# Altium PCB DelSolClock_Rear.PcbDoc
Units mil, origin at the board's own origin, x right, y up, seen from the top; angles counter-clockwise.
Board outline 2180.71 x 2455.51 mil, 2 copper layers (Top Layer, Bottom Layer); 14 components, 11 nets, 33 pads, 23 vias.
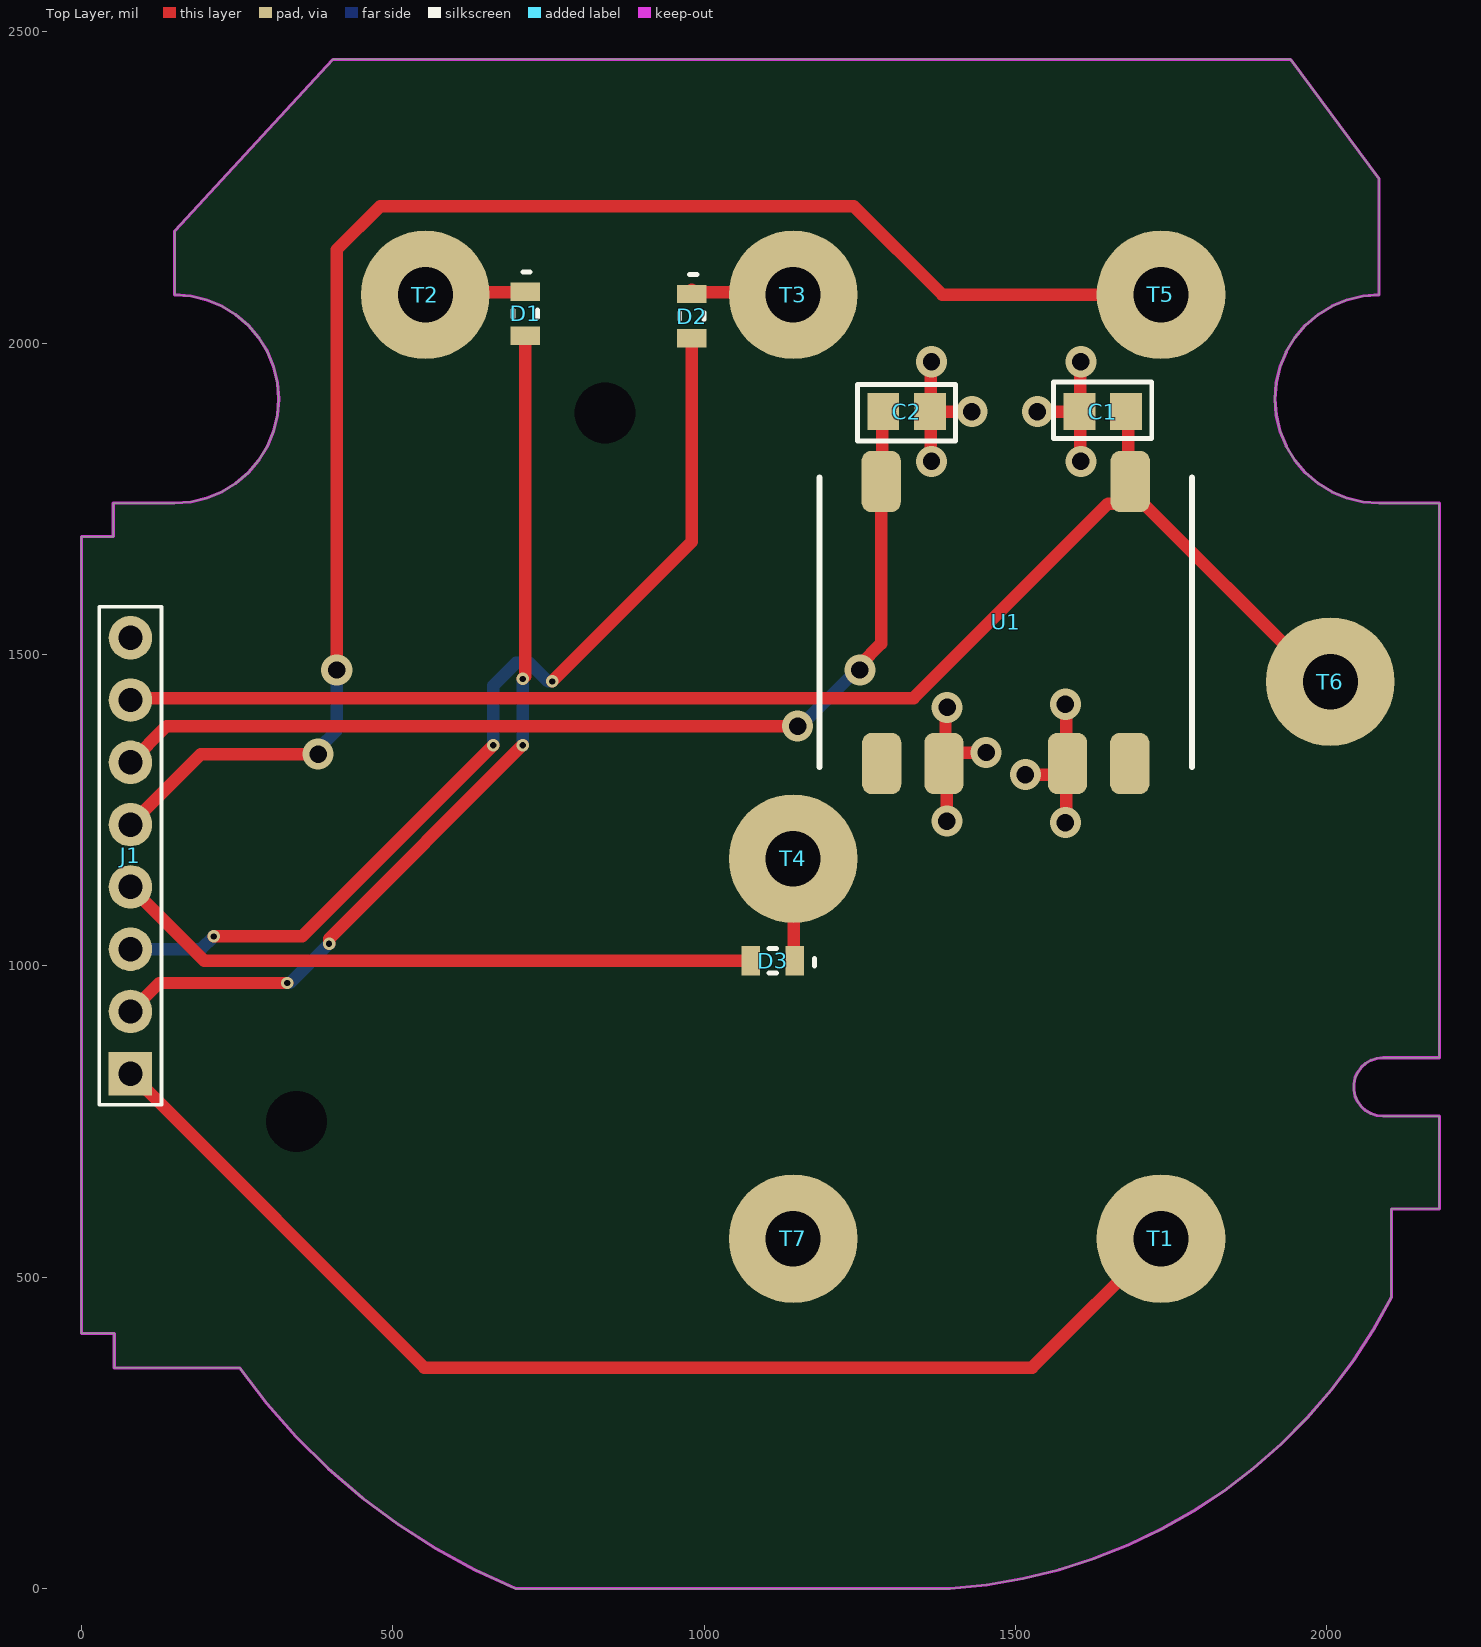
[diagram p0: Top Layer view]
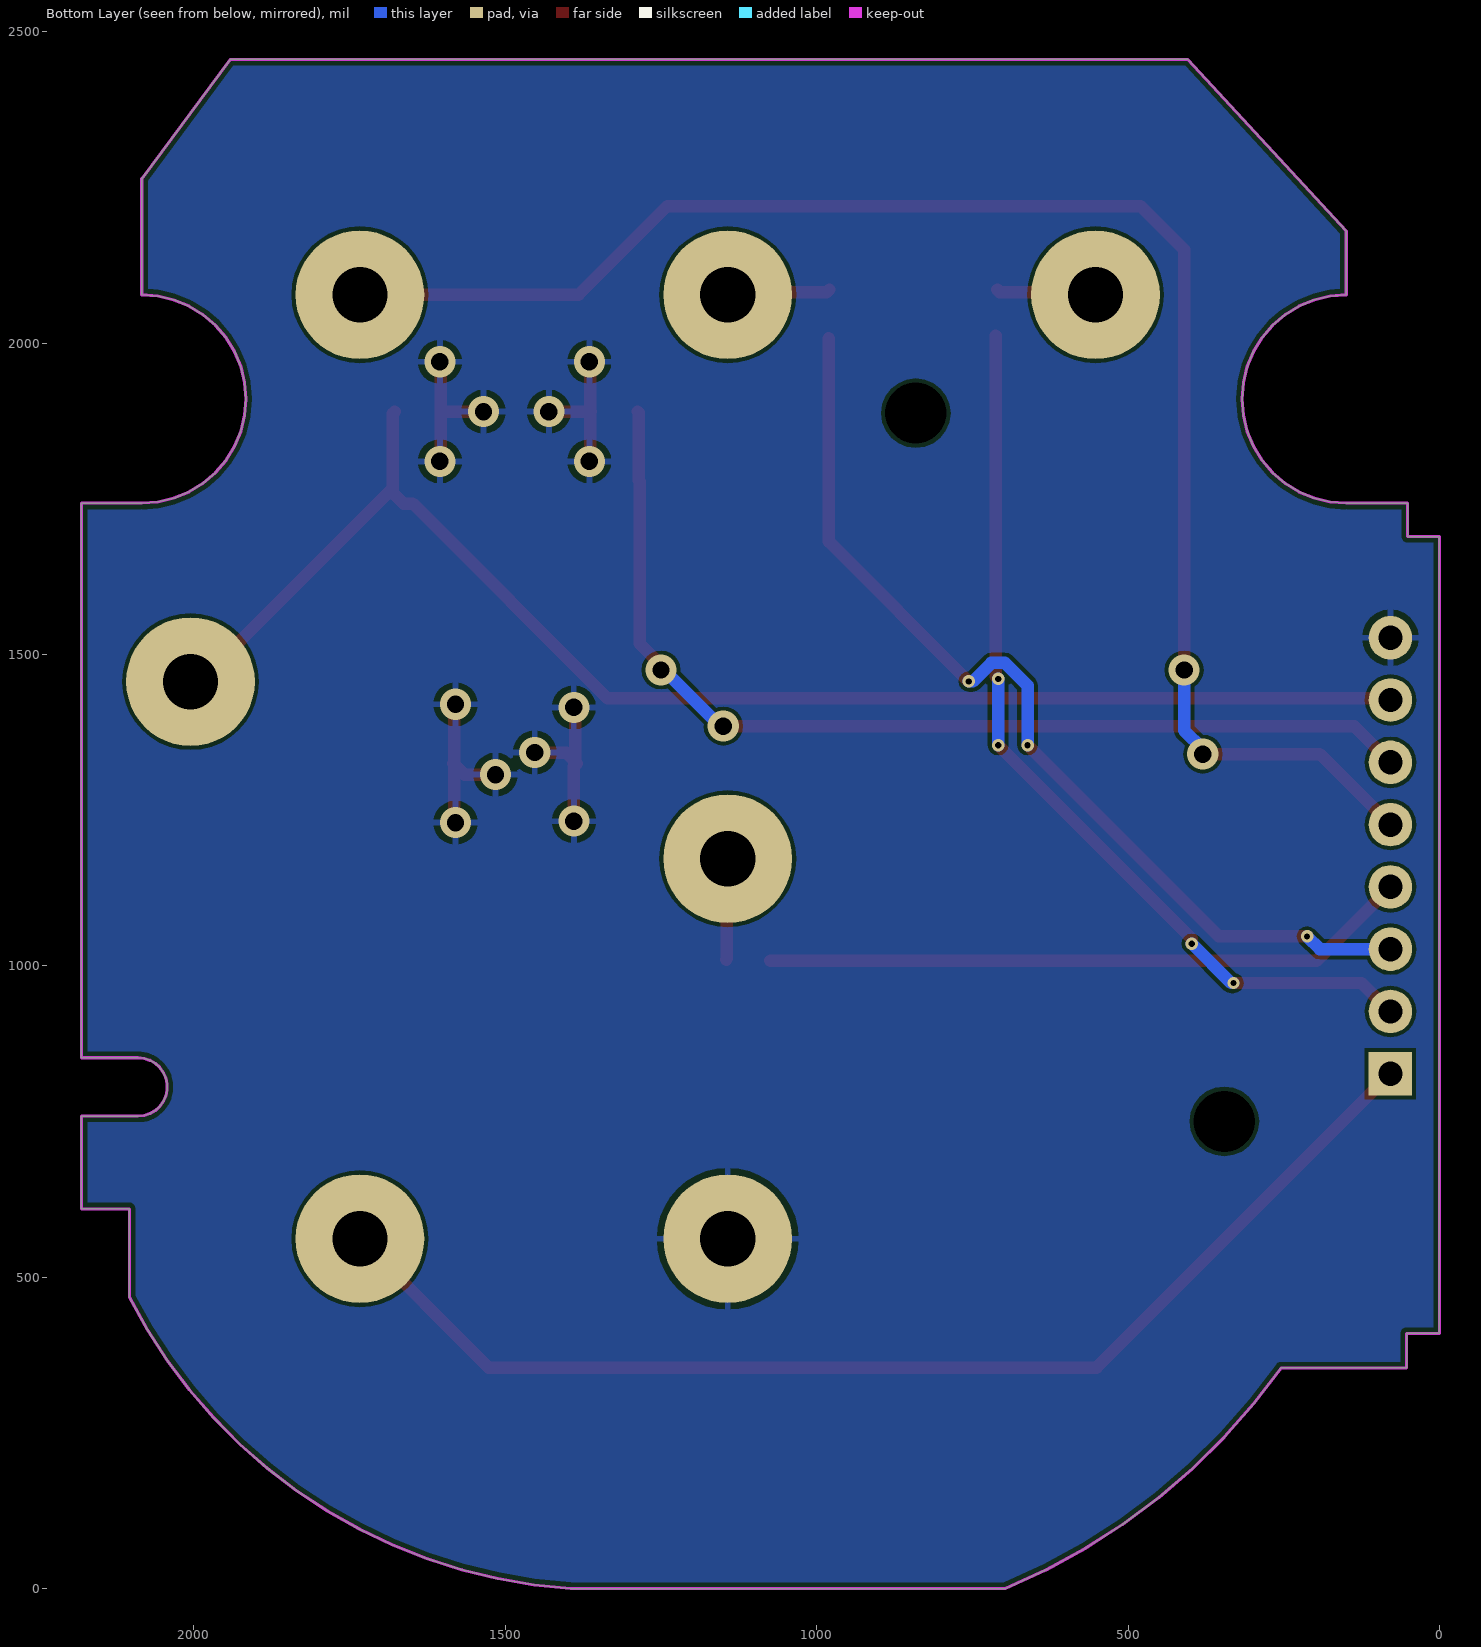
[diagram p1: Bottom Layer view, seen from below]

## Layer stack, top to bottom
Top Solder: solder mask 0.4, Solder Resist, Dk 3.5
Top Layer: signal copper 1.4
Dielectric 1: dielectric 12.6, FR-4, Dk 4.8
Bottom Layer: signal copper 1.4
Bottom Solder: solder mask 0.4, Solder Resist, Dk 3.5

## Board outline
0,1689.37 0,409.84 52.76,409.84 52.76,354.33 254.33,354.33 297.89,297.23 345.33,243.32 396.41,192.84 450.89,146.04 508.5,103.17 568.96,64.41 631.98,29.97 697.24,0 1394.88,0 1453.75,6.06 1512.06,16.14 1569.55,30.2 1625.93,48.18 1680.94,69.98 1734.33,95.51 1785.84,124.64 1835.24,157.24 1882.27,193.15 1926.73,232.2 1968.41,274.22 2007.1,318.99 2042.63,366.32 2074.83,415.97 2103.54,467.72 2103.54,609.84 2180.71,609.84 2180.71,758.66 2089.76,758.66 2080.02,759.68 2070.71,762.71 2062.23,767.61 2054.95,774.16 2049.19,782.09 2045.21,791.03 2043.17,800.61 2043.17,810.41 2045.21,819.99 2049.19,828.94 2054.95,836.86 2062.23,843.41 2070.71,848.31 2080.02,851.34 2089.76,852.36 2180.71,852.36 2180.71,1742.91 2083.86,1742.91 2057.68,1744.97 2032.15,1751.1 2007.9,1761.15 1985.51,1774.87 1965.54,1791.92 1948.49,1811.89 1934.77,1834.27 1924.72,1858.53 1918.6,1884.06 1916.54,1910.24 1918.6,1936.41 1924.72,1961.94 1934.77,1986.2 1948.49,2008.59 1965.54,2028.55 1985.51,2045.6 2007.9,2059.32 2032.15,2069.37 2057.68,2075.5 2083.86,2077.56 2083.86,2263.78 1941.73,2455.51 403.94,2455.51 149.61,2179.92 149.61,2077.56 175.78,2075.5 201.31,2069.37 225.57,2059.32 247.96,2045.6 267.92,2028.55 284.97,2008.59 298.69,1986.2 308.74,1961.94 314.87,1936.41 316.93,1910.24 314.87,1884.06 308.74,1858.53 298.69,1834.27 284.97,1811.89 267.92,1791.92 247.96,1774.87 225.57,1761.15 201.31,1751.1 175.78,1744.97 149.61,1742.91 51.18,1742.91 51.18,1689.37

## Design rules (kind name [scope] priority, off if disabled: settings)
BoardOutlineClearance [All] p1: gap=10 ignorepadtopadclearanceinfootprint=FALSE
Clearance Clearance_POWER [InNetClass('POWER') vs IsTrack] p1: gap=6 ignorepadtopadclearanceinfootprint=FALSE
Clearance [All] p2: gap=6 ignorepadtopadclearanceinfootprint=FALSE
ComponentClearance [All] p1: gap=5 collisioncheckmode=3 verticalgap=10 showdistances=FALSE
HoleSize [All] p1: absolutevalues=TRUE maxlimit=500 minlimit=10 maxpercent=80.000 minpercent=20.000
HoleToHoleClearance [All] p1: gap=6 allowstackedmicrovias=TRUE
MinimumSolderMaskSliver [All] p1: minsoldermaskwidth=3
PolygonConnect [All] p1: connectstyle=Relief reliefconductorwidth=10 reliefentries=4 polygonreliefangle="90 Angle" airgapwidth=10
RoutingVias [All] p1: holewidth=10 width=20 viastyle="Through Hole" minholewidth=10 minwidth=20 maxholewidth=10 maxwidth=20
SilkToSilkClearance [All] p1: silktosilkclearance=6
SilkToSolderMaskClearance [IsPad] p1: minsilkscreentomaskgap=6 clearancetoexposedcopper=TRUE
SolderMaskExpansion [All] p1: expansion=4 istentingtop=FALSE
Width Width_High_Power [InNetClass('HIGH_POWER')] p1: maxlimit=70 minlimit=70 preferedwidth=70
Width Width_Power [InNetClass('POWER')] p2: maxlimit=70 minlimit=25 preferedwidth=25
Width [All] p3: maxlimit=30 minlimit=6 preferedwidth=6
24 further rules are at their usual default settings.

## Components (designator, comment, footprint, x,y, rotation, side; value= is the part's Value field where it differs from the comment)
C1 "C2012X5R1E106K085AC" 6-0805 1640,1890 r0 top value=10uF
C2 "GRM21BR61A476ME15L" 6-0805 1325,1890 r180 top value=47uF
D1 "SD0805S020S1R0" "0805 HD - Polarized" 712.6,2047.24 r270 top
D2 "SD0805S020S1R0" "0805 HD - Polarized" 980.32,2043.31 r270 top
D3 "SD0805S020S1R0" "0805 HD - Polarized" 1110.24,1007.87 r180 top
J1 "68000-408HLF" "Conn, Header, 8x1 0.1 Pitch Unshrouded" 78.74,826.77 r90 top
T1 "Test Point, Spring" "Test Point, Spring"#1 1745,535 r0 top
T2 "Test Point, Spring" "Test Point, Spring"#2 545,2010 r0 top
T3 "Test Point, Spring" "Test Point, Spring"#3 1070,2025 r0 top
T4 "Test Point, Spring" "Test Point, Spring"#4 1125,1150 r0 top
T5 "Test Point, Spring" "Test Point, Spring"#5 1670,1985 r0 top
T6 "Test Point, Spring" "Test Point, Spring"#6 1890,1540 r0 top
T7 "Test Point, Spring" "Test Point, Spring"#7 1115,540 r0 top
U1 "STS1024S3V3" "Module, STS1024S3V3" 1783.43,1783.66 r180 top

## Footprints (in the part's own frame and the unit in brackets; to place one, negate y for a bottom-side part, rotate by r counter-clockwise, add the part's x,y. Pads: shape width x height; smd on the part's side, far side on the other; paste and mask are expansions set on the pad)
6-0805 [mm] "Chip Resistor; Body 2.0 x 1.3 mm (LxW typ)"
  rect 1.3x1.5 smd: 1(-0.95,0) 2(0.95,0)
  silkscreen extent -2,-1.1 2,1.2
"0805 HD - Polarized" [mm] "Chip Resistor, 2-Leads, Body 2.00x1.25mm, IPC High Density"
  rect 0.75x1.2 smd: 1(-0.9,0) 2(0.9,0)
  silkscreen extent -1.7,-0.5 0.15,0.5, body extent -1,-0.63 1,0.63, height 0.95
"Conn, Header, 8x1 0.1 Pitch Unshrouded" [mil] "Header, 8x1 0.1 Pitch Unshrouded"
  rect 70x70 hole 39: 1(0,0)
  round 70 hole 39: 2(100,0) 3(200,0) 4(300,0) 5(400,0) 6(500,0) 7(600,0) 8(700,0)
  silkscreen extent -50,-50 750,50
"Module, STS1024S3V3" [mm]
  rrect50% 1.6x2.5 smd: 1(2.52,0.15) 5(12.68,0.15) 6(12.66,11.65) 7(10.12,11.65) 9(5.08,11.65) 10(2.54,11.65)
  silkscreen extent 0,0 15.2,11.8
"Test Point, Spring"#1 [mm]
  round 5.25 hole 2.25: 1(-0.293,0.681)
"Test Point, Spring"#2 [mm]
  round 5.25 hole 2.25: 1(0.187,1.716)
"Test Point, Spring"#3 [mm]
  round 5.25 hole 2.25: 1(1.852,1.335)
"Test Point, Spring"#4 [mm]
  round 5.25 hole 2.25: 1(0.455,0.56)
"Test Point, Spring"#5 [mm]
  round 5.25 hole 2.25: 1(1.612,2.351)
"Test Point, Spring"#6 [mm]
  round 5.25 hole 2.25: 1(2.934,-2.126)
"Test Point, Spring"#7 [mm]
  round 5.25 hole 2.25: 1(0.709,0.554)

## Part data
C1 C2: library part Cap, "Capacitor"
  C1: MFGPN=C2012X5R1E106K085AC
  C2: MFGPN=GRM21BR61A476ME15L
D1 D2 D3: library part Diode, "Diode", DST=Digikey, MFG="Panasonic - ECG"
J1: library part "Conn, 68000-408HLF", "Header, 8x1 0.1\" Unshrouded Tin", DST=Digikey, DSTPN=609-3264-ND, ESTCOST=.149, MFG=FCI, MFGPN=68000-408HLF, System=connector
T1 T2 T3 T4 T5 T6 T7: "Test Point, for Del Sol Clock connection"
U1: library part "Module, STS1024S3V3", "Module, Regulator switching 3.3V 1A out 4.75-36v in SMT", DST=Digikey, DSTPN=1470-4724-ND, ESTCOST=7.95, MFG="XP Power", MFGPN=STS1024S3V3

## Free pads (board coordinates)
  round 60 hole 98.43: ""(345.47,750.08) ""(840.79,1887.6)

## Via types
v1: diameter 50, hole 28, Top Layer to Bottom Layer, 16 vias
v2: diameter 20, hole 10, Top Layer to Bottom Layer, 7 vias

## Nets (pads, with @x,y where several pads share a name; then routed paths per layer and width w, separated by ;. In a path a pad name is that pad's centre, name@x,y a point inside that pad or via, vN(x,y) a via of type N, cw(c..) or ccw(c..) an arc to the next point about the centre after c; other vN are vias at no path point)
3V3: C2.2 J1.6 U1.5 | length 1663.2
  Top Layer w20: J1.6 136.97,1385 v1(1150,1385) ; v1(1250,1475) 1250,1483.12 1284.21,1517.33 U1.5 1285.91,1779.45 1285.91,1888.31 C2.2
  Bottom Layer w20: v1(1150,1385) 1155,1385 1245,1475 v1(1250,1475)
+12: C1.2 J1.7 T6.1 U1.1 | length 2322.9
  Top Layer w20: J1.7 81.97,1430 1336.46,1430 1648.55,1742.09 1663.15,1742.09 U1.1@1684.21,1763.15 ; C1.2 1680.81,1886.59 1680.81,1766.56 U1.1@1684.21,1763.15 ; T6.1 1991.06,1456.3 U1.1@1684.21,1763.15
GND: C1.1 C2.1 J1.8 T7.1 U1.7 U1.9 | length 989
  Top Layer w20: v1(1365,1810) 1363.7,1811.3 1363.7,1888.7 C2.1 ; v1(1365,1970) 1363.7,1968.7 1363.7,1891.3 C2.1 ; v1(1389.76,1232.28) 1389.76,1320.24 U1.7 ; v1(1390,1415) 1387.5,1412.5 1387.5,1327.5 U1.7 ; v1(1430,1890) C2.1 ; v1(1452.76,1342.52) 1402.52,1342.52 U1.7 ; v1(1515.75,1307.09) 1565.51,1307.09 U1.9 ; v1(1535,1890) C1.1 ; v1(1580,1230) 1581.71,1231.71 1581.71,1323.29 U1.9 ; v1(1580,1420) 1581.71,1418.29 1581.71,1326.71 U1.9 ; v1(1605,1810) 1603.8,1811.2 1603.8,1888.8 C1.1 ; v1(1605,1970) 1603.8,1968.8 1603.8,1891.2 C1.1
IGN: J1.5 T5.1 | length 2582
  Top Layer w20: J1.5 191.97,1340 v1(380,1340) ; v1(410,1475) 410,2150 480,2220 1240,2220 1382.44,2077.56 T5.1
  Bottom Layer w20: v1(380,1340) 380,1348.12 410,1378.12 v1(410,1475)
ILL: J1.1 T1.1 | length 1935.8
  Top Layer w20: J1.1 550.51,355 1526.65,355 T1.1
NetD1_2: D1.2 J1.2 | length 1470.7
  Top Layer w20: J1.2 79.33,926.77 124.99,972.44 v2(330.71,972.44) ; v2(397.64,1035.43) 397.64,1043.31 v2(708.66,1354.33) ; v2(708.66,1460.63) 712.6,1464.57 D1.2
  Bottom Layer w20: v2(330.71,972.44) 334.65,972.44 v2(397.64,1035.43) ; v2(708.66,1354.33) v2(708.66,1460.63)
NetD2_2: D2.2 J1.3 | length 1580.3
  Top Layer w20: v2(212.6,1047.24) 354.33,1047.24 v2(661.42,1354.33) ; v2(755.91,1456.69) 980.32,1681.1 D2.2
  Bottom Layer w20: J1.3 192.13,1026.77 v2(212.6,1047.24) ; v2(661.42,1354.33) 661.42,1450.16 697.89,1486.63 719.43,1486.63 749.37,1456.69 v2(755.91,1456.69)
NetD3_2: D3.2 J1.4 | length 1045.3
  Top Layer w20: J1.4 197.64,1007.87 D3.2
ROOF: D2.1 T3.1 | length 166.2
  Top Layer w20: D2.1@980,2085.43 983.94,2081.5 1138.98,2081.5 T3.1
TRUNK: D1.1 T2.1 | length 161.1
  Top Layer w20: T2.1 556.52,2081.71 705.85,2081.71 D1.1@710,2085.87
WINDOW: D3.1 T4.1 | length 163.1
  Top Layer w20: T4.1 1144.17,1170.79 1144.17,1011.26 D3.1@1145.43,1010
pads on no net: U1.6 U1.10

## Polygon pours and split planes (outlines as drawn)
GND on Bottom Layer "GND_L02_P000" (solid, remove dead copper, pour order 0): 0,0 0,2480.32 2204.72,2480.32 2204.72,0

## Keep-outs
Keep-Out Layer:
  the board outline again, w5

## Silkscreen, mask and mechanical layers (free items; w line width, h text height)
Mechanical 1:
  the board outline again, w40

## Dimensions
316.93,1910.24 to 78.74,1526.77 on Mechanical 13